# Allegro board single.brd
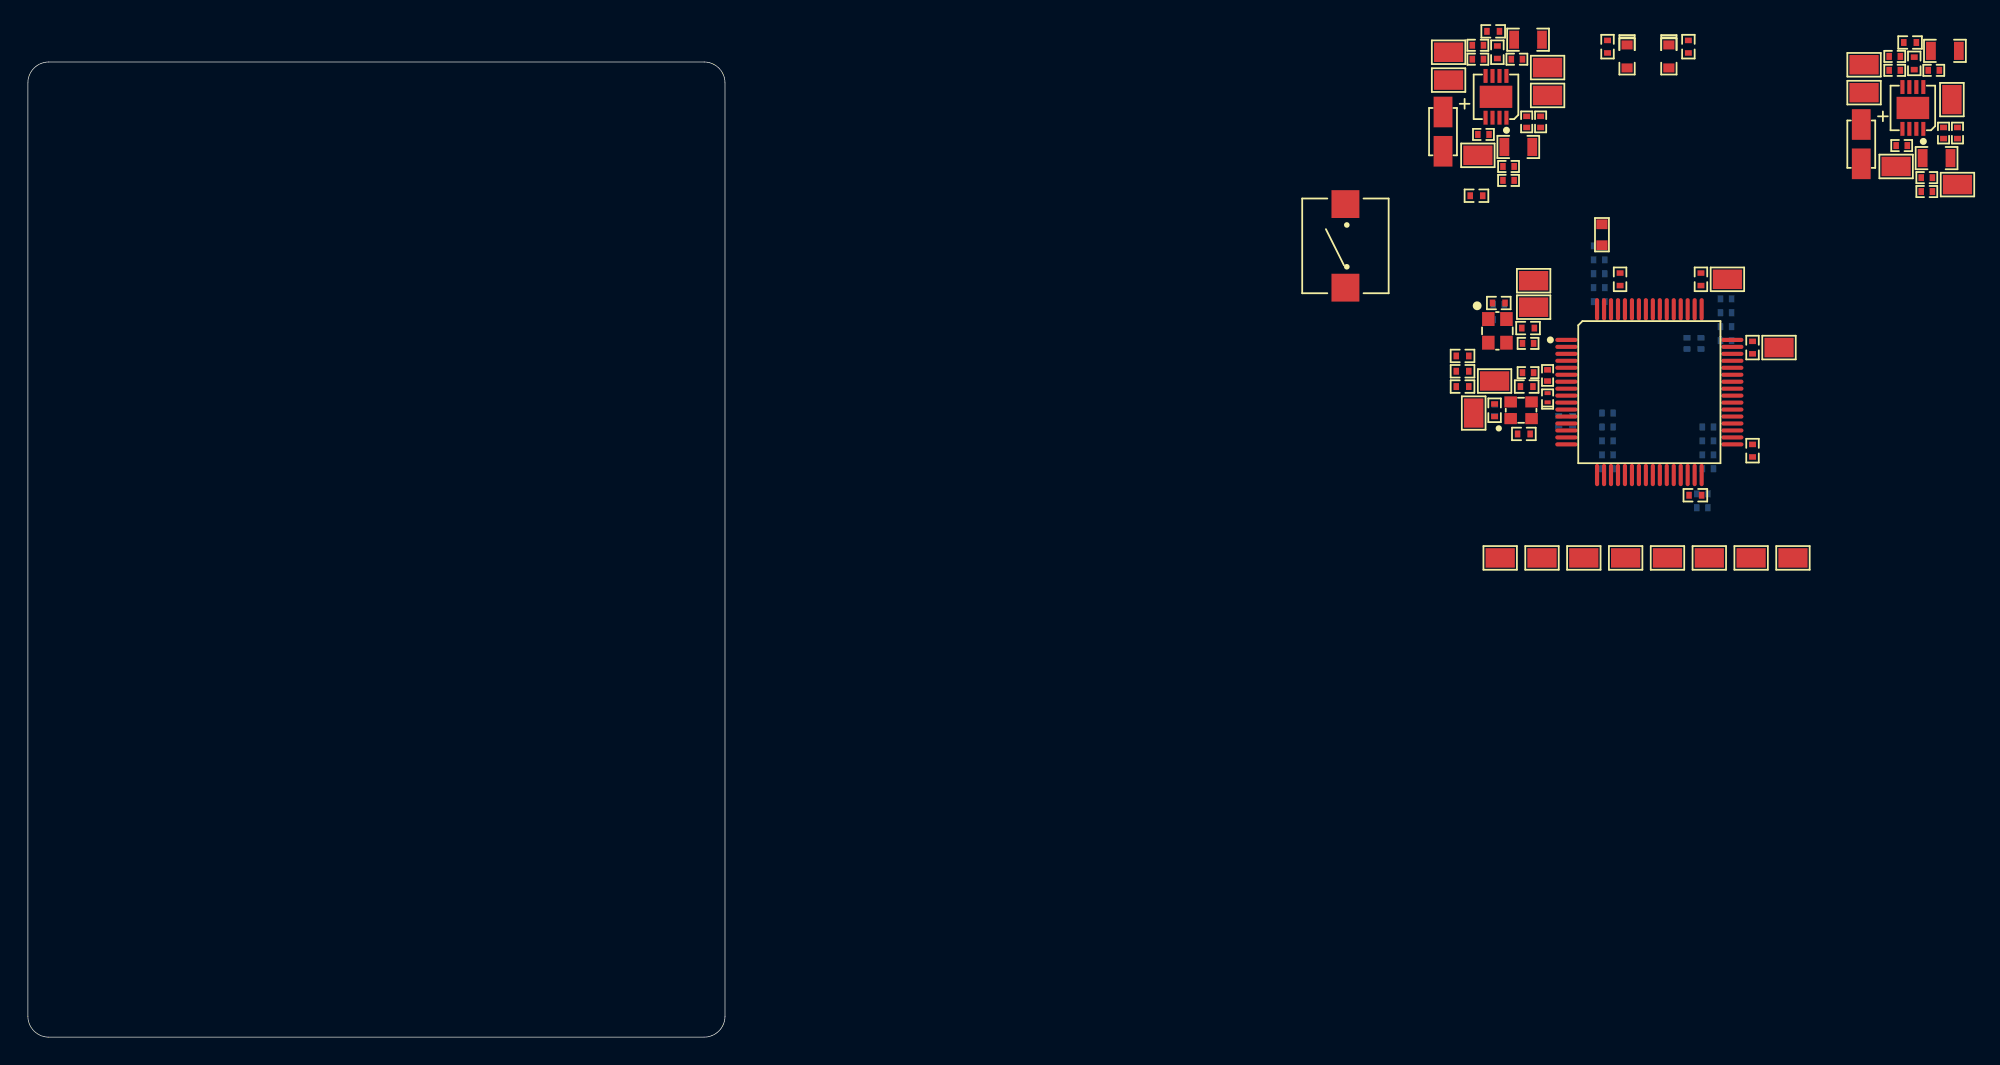
[diagram p0: board, top side]
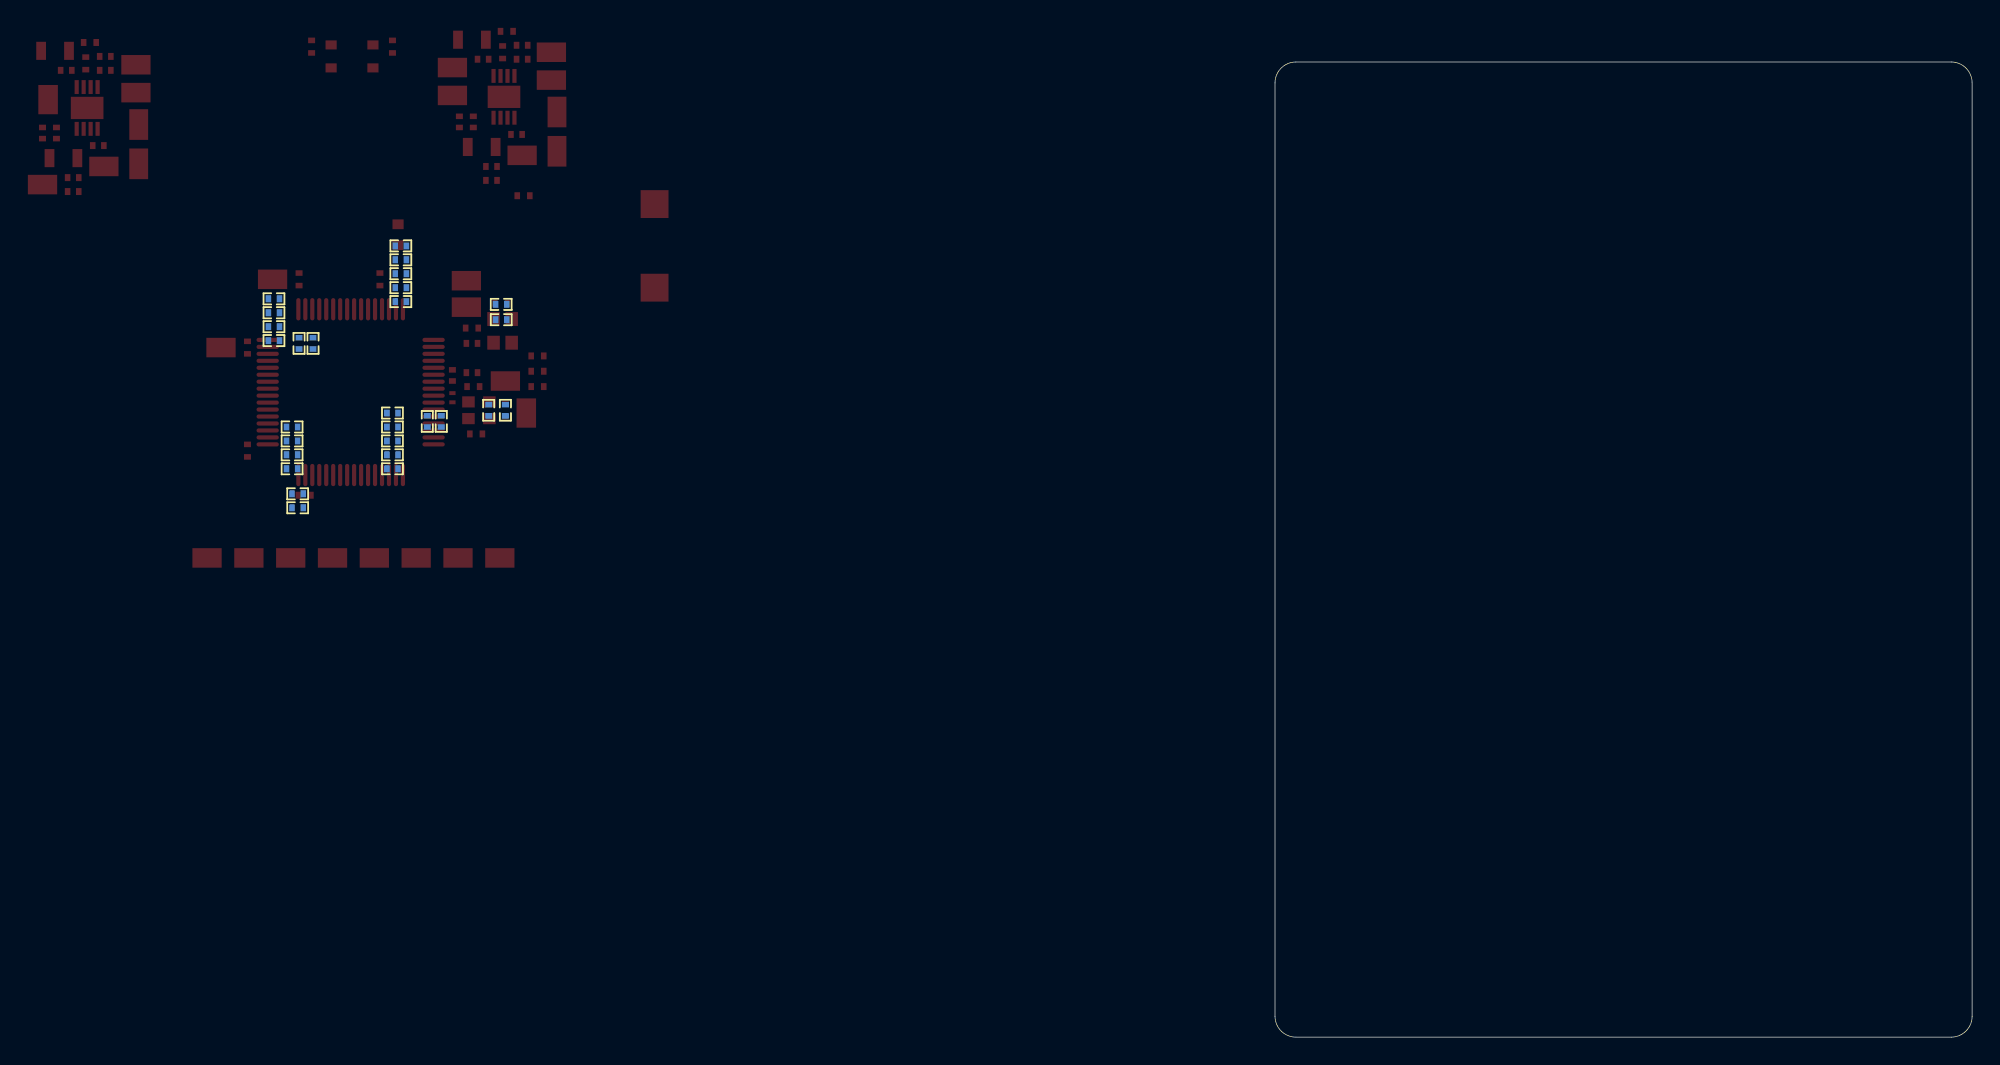
[diagram p1: board, bottom side, seen from below]

Outline 50 x 70 mm; copper layers: TOP, GND, POWER, BOTTOM. Coordinates in mm from the lower left corner of the outline.
Outline path: 0,68.5 arc(0.44,69.56) 1.5,70 48.5,70 arc(49.56,69.56) 50,68.5 50,1.5 arc(49.56,0.44) 48.5,0 1.5,0 arc(0.44,0.44) 0,1.5 0,68.5

## Design rules (mm)
constraint set DEFAULT: min track width 0.127

## Placement (name value [footprint] x y rotation side)
C1  1uF  [C0402]  109 47.5 270 top
C2  2.2uF  [C0402]  120 49.8 270 bottom
C3  2.2uF  [C0402]  119 49.8 270 bottom
C4  1uF  [C0402]  109.8 44.2 270 bottom
C5  100nF  [C0402]  110.8 44.2 270 bottom
C6  10nF  [C0402]  106.4 45 270 bottom
C7  1uF  [C0402]  105.2 45 270 bottom
C8  10pF  [C0402]  107.6 47.7 0 top
C9  2.2uF  [C0402]  120.1 39 0 bottom
C10  2.2uF  [C0402]  120.1 38 0 bottom
C11  10nF  [C0402]  105.5 51.5 180 bottom
C12  1uF  [C0402]  105.5 52.6 180 bottom
C13  10pF  [C0402]  107.6 49.8 0 top
C14  4.7uF  [C0402]  112.7 56.8 180 bottom
C15  1uF  [C0402]  112.7 55.8 180 bottom
C16  100nF  [C0402]  112.7 54.8 180 bottom
C17  100nF  [C0402]  112.7 53.8 180 bottom
C18  100nF  [C0402]  112.7 52.8 180 bottom
C19  100nF  [C0402]  121.8 53 0 bottom
C20  100nF  [C0402]  121.8 52 0 bottom
C21  100nF  [C0402]  121.8 51 0 bottom
C22  100nF  [C0402]  121.8 50 0 bottom
C23  100nF  [C0402]  120.5 43.8 180 bottom
C24  100nF  [C0402]  120.5 42.8 180 bottom
C25  100nF  [C0402]  120.5 41.8 180 bottom
C26  100nF  [C0402]  120.5 40.8 180 bottom
C27  100nF  [C0402]  113.3 44.8 0 bottom
C28  100nF  [C0402]  113.3 43.8 0 bottom
C29  100nF  [C0402]  113.3 42.8 0 bottom
C30  100nF  [C0402]  113.3 41.8 0 bottom
C31  10pF  [C0402]  113.3 40.8 0 bottom
C52  2.2uF  [C0402]  104 71.2 180 top
C53  2.2uF  [C0402]  104 70.2 180 top
C54  47uF  [C3216-18]  101.5 65 270 top
C55  1uF  [C0402]  104.4 64.8 180 top
C56  47uF  [C0805]  106.9 63.9 0 top
C57  10uF  [C0402]  106.2 62.5 0 top
C58  10nF  [C0402]  106.2 61.5 0 top
C59  2.2uF  [C0402]  107.5 65.7 90 top
C60  10uF  [C0402]  108.5 65.7 90 top
C61  47uF  [C0805]  107.6 71.6 180 top
C62  100nF  [C0402]  106.8 70.2 180 top
C63  2.2uF  [C0402]  133.9 69.4 180 top
C64  2.2uF  [C0402]  133.9 70.4 180 top
C65  1uF  [C0402]  134.4 64 180 top
C66  47uF  [C0805]  136.9 63.1 0 top
C67  10nF  [C0402]  136.2 60.7 0 top
C68  47uF  [C3216-18]  131.5 64.1 270 top
C69  10uF  [C0402]  136.2 61.7 0 top
C70  2.2uF  [C0402]  137.4 64.9 90 top
C71  10uF  [C0402]  138.4 64.9 90 top
C72  47uF  [C0805]  137.5 70.8 180 top
C73  100nF  [C0402]  136.7 69.4 180 top
D1  ESD101-B1-02EL  [D0402]  109 45.9 90 top
D6  LED  [D0603]  114.7 70.4 270 top
D7  LED  [D0603]  117.7 70.4 270 top
L1  0@100MHz  [L0603]  112.9 57.6 90 top
R1  10k  [R0402]  114.2 54.4 90 top
R2  10k  [R0402]  120 54.4 90 top
R3  1k  [R0402]  103.9 60.4 180 top
R4  10k  [R0402]  102.9 48.9 0 top
R5  10k  [R0402]  102.9 47.8 0 top
R6  10k  [R0402]  102.9 46.7 0 top
R7  10k  [R0402]  123.7 49.5 270 top
R8  4.7k  [R0402]  107.3 43.3 0 top
R9  10k  [R0402]  123.7 42.1 90 top
R10  4.7k  [R0402]  105.2 45 270 top
R11  10k  [R0402]  119.6 38.9 180 top
R12  10R  [R0402]  107.5 46.7 180 top
R13  4.7k  [R0402]  105.5 52.7 180 top
R14  10R  [R0402]  107.6 50.9 180 top
R39  10k  [R0402]  105.4 70.7 90 top
R40  100R  [R0402]  105.1 72.2 0 top
R41  4.7k  [R0402]  113.3 71.1 90 top
R42  10k  [R0402]  135.3 69.9 270 top
R43  100R  [R0402]  135 71.4 0 top
R44  4.7k  [R0402]  119.1 71.1 90 top
S1  TOUCH SWITCH  [6_6_5]  94.5 56.8 90 top
TP1  TEST POINT  [TP0805]  121.9 54.4 0 top
TP2  TEST POINT  [TP0805]  125.6 49.5 0 top
TP3  TEST POINT  [TP0805]  103.7 44.8 90 top
TP4  TEST POINT  [TP0805]  105.6 34.4 0 top
TP5  TEST POINT  [TP0805]  105.2 47.1 0 top
TP6  TEST POINT  [TP0805]  108.6 34.4 0 top
TP7  TEST POINT  [TP0805]  111.6 34.4 0 top
TP8  TEST POINT  [TP0805]  114.6 34.4 0 top
TP9  TEST POINT  [TP0805]  117.6 34.4 0 top
TP10  TEST POINT  [TP0805]  120.6 34.4 0 top
TP11  TEST POINT  [TP0805]  123.6 34.4 0 top
TP12  TEST POINT  [TP0805]  126.6 34.4 0 top
TP13  TEST POINT  [TP0805]  108 54.3 0 top
TP14  TEST POINT  [TP0805]  108 52.4 0 top
TP27  TEST POINT  [TP0805]  101.9 70.7 0 top
TP28  TEST POINT  [TP0805]  101.9 68.7 0 top
TP29  TEST POINT  [TP0805]  109 67.6 0 top
TP30  TEST POINT  [TP0805]  104 63.3 0 top
TP31  TEST POINT  [TP0805]  109 69.6 0 top
TP32  TEST POINT  [TP0805]  131.7 69.8 0 top
TP33  TEST POINT  [TP0805]  131.7 67.8 0 top
TP34  TEST POINT  [TP0805]  134 62.5 0 top
TP35  TEST POINT  [TP0805]  138.4 61.2 0 top
TP36  TEST POINT  [TP0805]  138 67.3 270 top
U1  STM32F405RGT6  [LQFP_64]  116.3 46.3 270 top
U6  ADM7154-3V3  [LFCSP_8]  105.3 67.5 90 top
U7  ADM7154-3V  [LFCSP_8]  135.2 66.7 90 top
Y1  OSC-8M  [Y2016]  107.1 45 0 top
Y2  OSC-32K  [Y2520]  105.4 50.7 270 top

## Library data of the parts
C1-C31 C52 C53 C55-C67 C69-C73 = C NP
C54 C68 = C_T
D1 = ESD101B102ELSE6327XTSA1
D6 D7 = LED
L1 = INDUCTOR_FERRITE
R1-R14 R39-R44 = R
S1 = Touch Switch
TP1-TP14 TP27-TP36 = TEST POINT
U1 = STM32F405RGT6
U6 = LDO_ADM7154-3V3
U7 = LDO_ADM7154-3V0
Y1 = OSC_8M
Y2 = OSC_32K

## Footprints (pads in the part's own frame, mm; a bottom-side part is the same pattern mirrored in y, then rotated)
6_6_5
  rect 2x2 smd: 1(-3,0) 2(3,0)
C0402
  rect 0.4x0.5 smd: 1(-0.4,0) 2(0.4,0)
C0805
  rect 0.7x1.3 smd: 1(-1,0) 2(1,0)
C3216-18
  rect 2.2x1.35 smd: 1(-1.41,0) 2(1.41,0)
D0402
  rect 0.28x0.45 smd: 1(-0.33,0) 2(0.33,0)
D0603
  rect 0.65x0.8 smd: 1(-0.825,0) 2(0.825,0)
L0603
  rect 0.7x0.8 smd: 1(-0.75,0) 2(0.75,0)
LFCSP_8
  rect 1x0.3 smd: 1(-1.5,-0.75) 2(-1.5,-0.25) 3(-1.5,0.25) 4(-1.5,0.75) 5(1.5,0.75) 6(1.5,0.25) 7(1.5,-0.25) 8(1.5,-0.75)
  rect 1.6x2.34 smd: 9(0,0)
LQFP_64
  oval 0.3x1.6 smd: 1(-3.75,-5.95) 2(-3.25,-5.95) 3(-2.75,-5.95) 4(-2.25,-5.95) 5(-1.75,-5.95) 6(-1.25,-5.95) 7(-0.75,-5.95) 8(-0.25,-5.95) 9(0.25,-5.95) 10(0.75,-5.95) 11(1.25,-5.95) 12(1.75,-5.95) 13(2.25,-5.95) 14(2.75,-5.95) 15(3.25,-5.95) 16(3.75,-5.95) 33(3.75,5.95) 34(3.25,5.95) 35(2.75,5.95) 36(2.25,5.95) 37(1.75,5.95) 38(1.25,5.95) 39(0.75,5.95) 40(0.25,5.95) 41(-0.25,5.95) 42(-0.75,5.95) 43(-1.25,5.95) 44(-1.75,5.95) 45(-2.25,5.95) 46(-2.75,5.95) 47(-3.25,5.95) 48(-3.75,5.95)
  oval 1.6x0.3 smd: 17(5.95,-3.75) 18(5.95,-3.25) 19(5.95,-2.75) 20(5.95,-2.25) 21(5.95,-1.75) 22(5.95,-1.25) 23(5.95,-0.75) 24(5.95,-0.25) 25(5.95,0.25) 26(5.95,0.75) 27(5.95,1.25) 28(5.95,1.75) 29(5.95,2.25) 30(5.95,2.75) 31(5.95,3.25) 32(5.95,3.75) 49(-5.95,3.75) 50(-5.95,3.25) 51(-5.95,2.75) 52(-5.95,2.25) 53(-5.95,1.75) 54(-5.95,1.25) 55(-5.95,0.75) 56(-5.95,0.25) 57(-5.95,-0.25) 58(-5.95,-0.75) 59(-5.95,-1.25) 60(-5.95,-1.75) 61(-5.95,-2.25) 62(-5.95,-2.75) 63(-5.95,-3.25) 64(-5.95,-3.75)
R0402
  rect 0.4x0.5 smd: 1(-0.45,0) 2(0.45,0)
TP0805
  rect 2.1x1.4 smd: 1(0,0)
Y2016
  rect 0.9x0.8 smd: 1(-0.75,-0.6) 2(0.75,-0.6) 3(0.75,0.6) 4(-0.75,0.6)
Y2520
  rect 1x0.9 smd: 1(-0.85,-0.65) 2(0.85,-0.65) 3(0.85,0.65) 4(-0.85,0.65)

## Nets
3V: C66.1 C67.1 C69.1 D7.2 TP34.1 U7.2
3V3: C4.2 C5.2 C6.1 C7.1 C11.1 C12.1 C14.2 C15.2 C16.2 C17.2 C18.2 C19.2 C20.2 C21.2 C22.2 C23.2 C24.2 C25.2 C26.2 C27.2 C28.2 C29.2 C30.2 C31.2 C56.1 C57.1 C58.1 D6.2 R3.1 R7.1 R8.1 R10.1 R13.1 TP3.1 TP13.1 TP30.1 U1.13 U1.19 U1.32 U1.48 U1.64 U6.2 Y1.4(VCC) Y2.4(VCC)
5V: R39.1 R40.1 R42.1 R43.1
AGND: C4.1 C5.1 U1.12
DGND: C1.1 C2.1 C3.1 C6.2 C7.2 C8.1 C9.2 C10.2 C11.2 C12.2 C13.1 C14.1 C15.1 C16.1 C17.1 C18.1 C19.1 C20.1 C21.1 C22.1 C23.1 C24.1 C25.1 C26.1 C27.1 C28.1 C29.1 C30.1 C31.1 D1.1 L1.1 R1.1 R2.1 R4.1 R5.1 R6.1 R9.1 R11.1 R41.1 R44.1 S1.1 U1.18 U1.63(VSS_4) Y1.2 Y2.2
PGND: C52.2 C53.2 C54.2 C55.2 C56.2 C57.2 C58.2 C59.1 C60.1 C61.1 C62.1 C63.2 C64.2 C65.2 C66.2 C67.2 C68.2 C69.2 C70.1 C71.1 C72.1 C73.1 L1.2 U6.4 U6.9 U7.4 U7.9
BOOT0: U1.60
BOOT1: TP12.1 U1.28
CDC_CLK: TP6.1 U1.21
CDC_MISO: TP7.1 U1.22
CDC_MOSI: TP8.1 U1.23
CDC_NSS: TP4.1 U1.20
IIC_EN: TP11.1 U1.27
INTN: TP10.1 U1.25
OSC32_IN: C13.2 R14.1 TP14.1 U1.3
OSC_IN: C8.2 R12.1 TP5.1 U1.5
PA1: U1.15
PA2: U1.16
PA3: U1.17
PG3: TP9.1 U1.24
RESET: C1.2 D1.2 R3.2 S1.2 U1.7
RX: U1.43
SWCLK: R2.2 TP1.1 U1.49
SWDIO: R7.2 TP2.1 U1.46
TX: U1.42
USB_DM: U1.44
USB_DP: U1.45
USB_ID: U1.26
N02715: C2.2 C3.2 U1.47
N26347: R14.2 Y2.3
N29089: R12.2 Y1.3
N60341: C54.1 C55.1 TP28.1 U6.3
N60528: C52.1 C53.1 TP27.1 U6.5 U6.6
N60691: C59.2 C60.2 TP29.1 U6.1(VREG)
N73371: C63.1 C64.1 TP32.1 U7.5 U7.6
N73413: C65.1 C68.1 TP33.1 U7.3
N73497: C70.2 C71.2 TP35.1 U7.1(VREG)
N460116: R39.2 U6.7
N460149: C61.2 C62.2 R40.2 TP31.1 U6.8
N460345: R42.2 U7.7
N460349: C72.2 C73.2 R43.2 TP36.1 U7.8
N505208: D6.1(CATHODE) R41.2
N505467: D7.1(CATHODE) R44.2
N584999: C9.1 C10.1 U1.31
N596448: R9.2 U1.33 U1.34 U1.35 U1.36 U1.37 U1.38 U1.39 U1.40 U1.41
N899054: R6.2 U1.2 U1.8 U1.9 U1.10 U1.11
N902106: R8.2 U1.14
N910178: R11.2 U1.29 U1.30
N910776: R10.2 Y1.1
N911543: R13.2 Y2.1
N916741: R1.2 U1.50 U1.51 U1.52 U1.53 U1.54 U1.55 U1.56 U1.57 U1.58 U1.59 U1.61 U1.62
N1367719: R4.2 U1.4
N1367723: R5.2 U1.6

Pads without a net: U1 1
